# EAGLE board NicoLase Arduino Sheild (EAGLE 7.4.0)
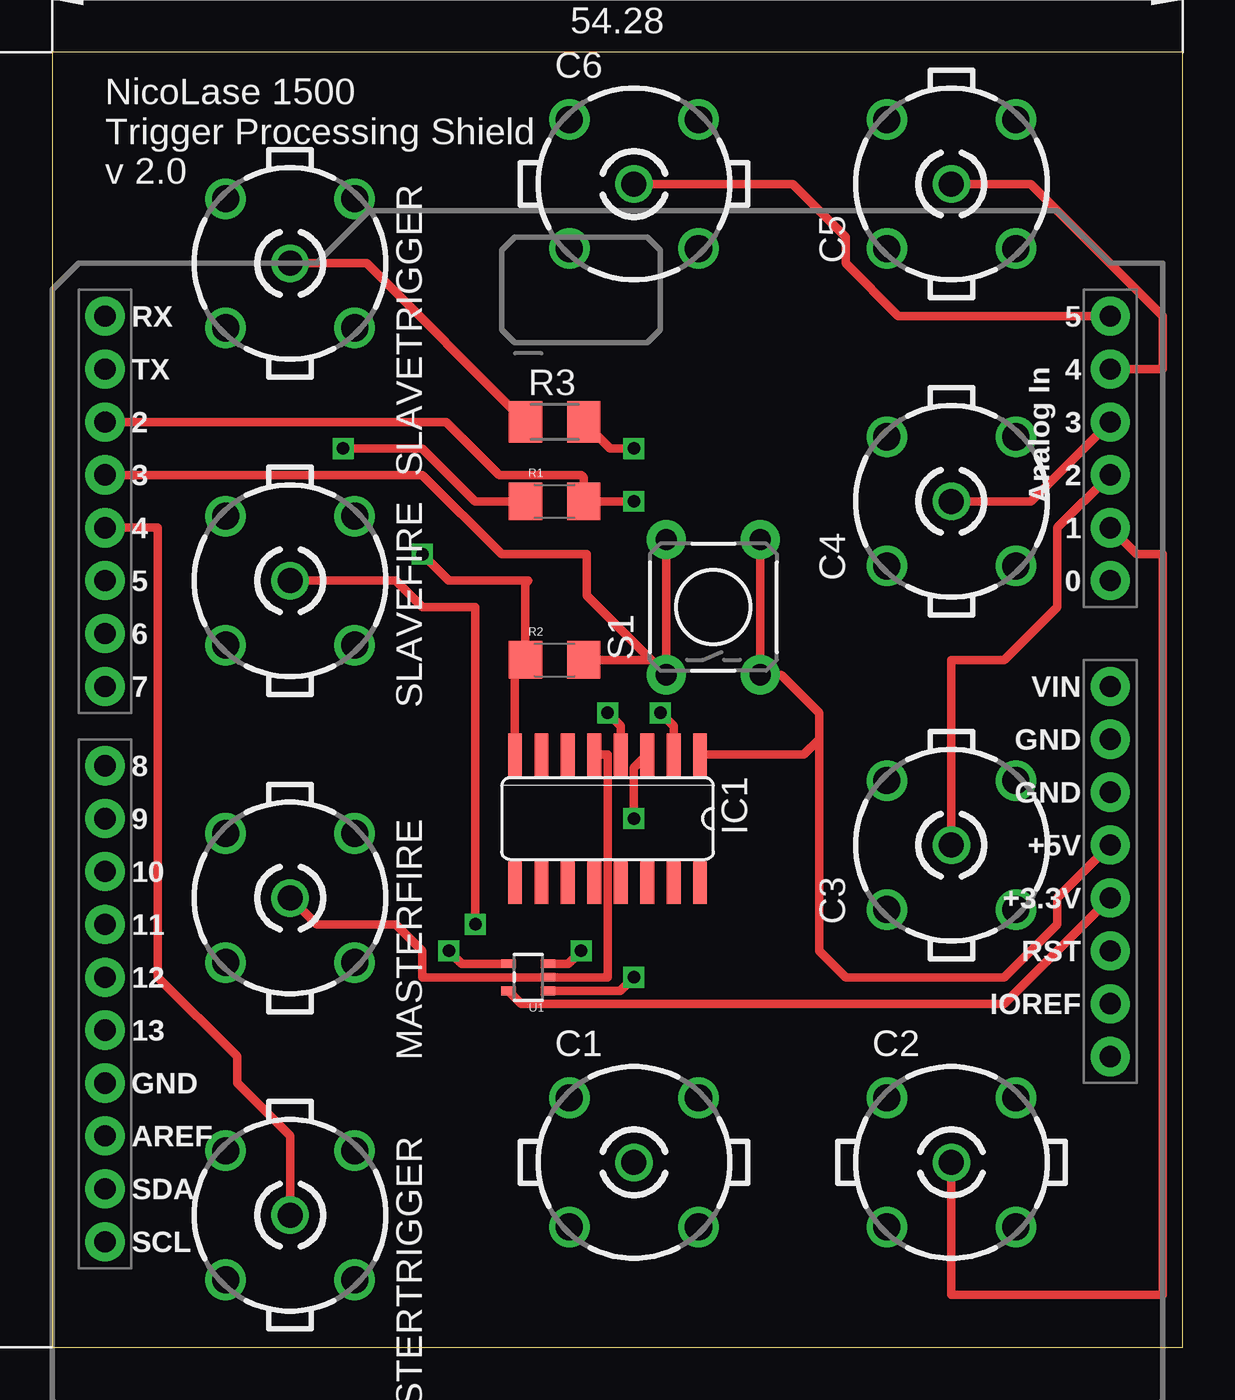
[diagram p0: board, top side]
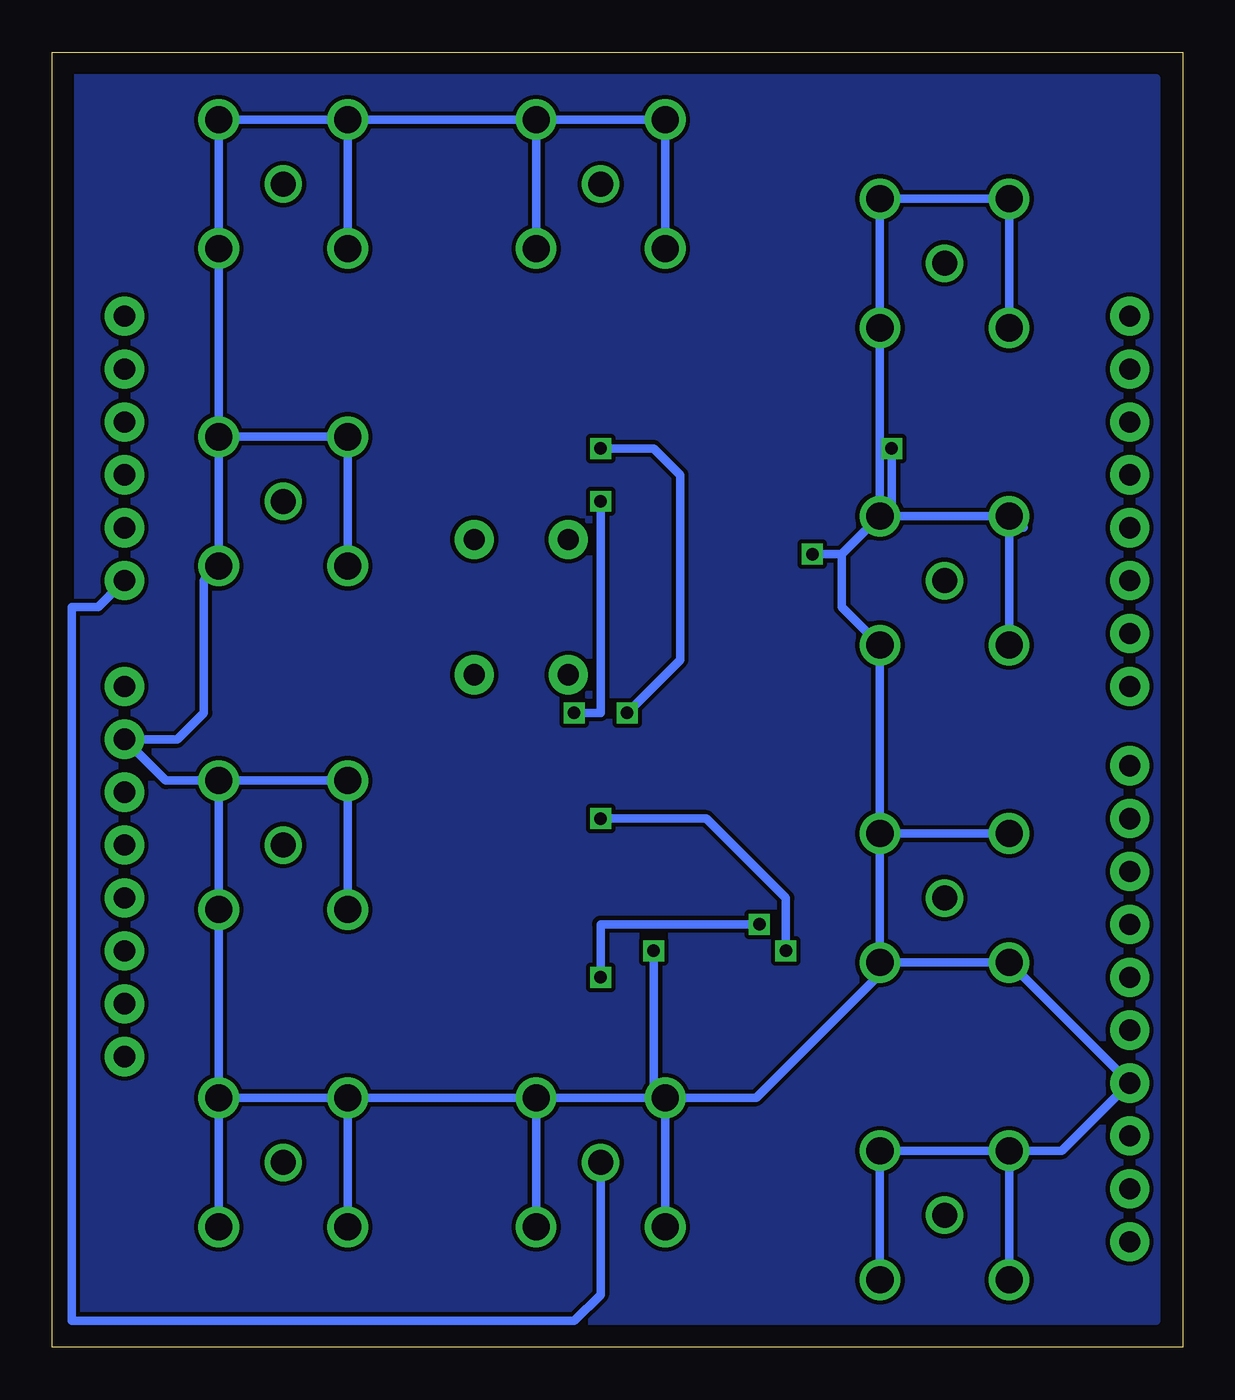
[diagram p1: board, bottom side, seen from below]

Size 54.28 x 62.22 mm. Coordinates in mm from the lower left corner, seen from the top.
Outline: 0,0 54.28,0 54.28,62.22 0,62.22 0,0
Copper layers (1*16): Top 0.035mm / dielectric 1.5mm / Bottom 0.035mm
Design rules "default": minimum track width 10mil, minimum drill 24mil, track to track 8mil, track to pad 8mil, pad to pad 8mil, via to via 8mil, smd to smd 8mil, copper to edge 40mil, drill to drill 8mil, minimum pad ring 10mil, minimum via ring 8mil, stop-mask expansion 4mil, vias tented up to drill 0mil, thermal gap 10mil

## Footprints (pad centres in the part's own frame; a part is rotated, then mirrored left to right if it is on the bottom)
B35N61 = drill 1.2: 1 0,0 | drill 1.3: 2 3.099,3.099; 3 -3.099,3.099; 4 -3.099,-3.099; 5 3.099,-3.099
SO16 = smd 0.66 x 2.032: 1 -4.445,-3.073; 2 -3.175,-3.073; 3 -1.905,-3.073; 4 -0.635,-3.073; 5 0.635,-3.073; 6 1.905,-3.073; 7 3.175,-3.073; 8 4.445,-3.073; 9 4.445,3.073; 10 3.175,3.073; 11 1.905,3.073; 12 0.635,3.073; 13 -0.635,3.073; 14 -1.905,3.073; 15 -3.175,3.073; 16 -4.445,3.073
UNO_R3_SHIELD = drill 1.016 pad 1.88: 3.3V 50.8,26.67; 5V 50.8,29.21; A0 50.8,41.91; A1 50.8,44.45; A2 50.8,46.99; A3 50.8,49.53; A4 50.8,52.07; A5 50.8,54.61; AREF 2.54,15.24; D2 2.54,49.53; D3 2.54,46.99; D4 2.54,44.45; D5 2.54,41.91; D6 2.54,39.37; D7 2.54,36.83; D8 2.54,33.02; D9 2.54,30.48; D10 2.54,27.94; D11 2.54,25.4; D12 2.54,22.86; D13 2.54,20.32; GND@0 50.8,31.75; GND@1 50.8,34.29; GND@2 2.54,17.78; IOREF 50.8,21.59; NC 50.8,19.05; RES 50.8,24.13; RX 2.54,54.61; SCL 2.54,10.16; SDA 2.54,12.7; TX 2.54,52.07; VIN 50.8,36.83
1206 = smd 1.6 x 1.8: 1 -1.4,0; 2 1.4,0
M1206 = smd 1.6 x 2: 1 -1.4,0; 2 1.4,0
TACTILE-PTH = drill 1.016 pad 1.88: 1 -3.251,2.261; 2 3.251,2.261; 3 -3.251,-2.261; 4 3.251,-2.261
SOT353 = smd 0.42 x 0.7: 1 -0.65,-0.95; 2 0,-0.95; 3 0.65,-0.95; 4 0.65,0.95; 5 -0.65,0.95

## Placement (x,y rotation side)
C1  BN35N61  [B35N61]  27.94,8.89 0 top
C2  BN35N61  [B35N61]  43.18,8.89 0 top
C3  BN35N61  [B35N61]  43.18,24.13 90 top
C4  BN35N61  [B35N61]  43.18,40.64 90 top
C5  BN35N61  [B35N61]  43.18,55.88 90 top
C6  BN35N61  [B35N61]  27.94,55.88 0 top
IC1  4050D  [SO16]  26.67,25.4 180 top
J1  ARDUINO_R3_SHIELD  [UNO_R3_SHIELD]  0,-5.08 0 top
MASTERFIRE  BN35N61  [B35N61]  11.43,21.59 270 top
MASTERTRIGGER  BN35N61  [B35N61]  11.43,6.35 270 top
R1  10k  [1206]  24.13,40.64 0 top
R2  10k  [1206]  24.13,33.02 0 top
R3  220  [M1206]  24.13,44.45 0 top
S1  [TACTILE-PTH]  31.75,35.56 90 top
SLAVEFIRE  BN35N61  [B35N61]  11.43,36.83 270 top
SLAVETRIGGER  BN35N61  [B35N61]  11.43,52.07 270 top
U1  7432SE  [SOT353]  22.86,17.78 90 top

## Library data of the parts
C1-C6 MASTERFIRE MASTERTRIGGER SLAVEFIRE SLAVETRIGGER = con-coax; OC_FARNELL: unknown; OC_NEWARK: unknown
IC1 = 40xx
J1 = SparkFun-Boards
R1 = SparkFun-Resistors
R2 = SparkFun-Passives
R3 = resistor
S1 = SparkFun-Retired
U1 = SparkFun-DigitalIC; PROD_ID: IC-10842

## Nets
N$1: J1.3.3V U1.5
N$2: C1.2 C1.3 C1.4 C1.5 C2.2 C2.3 C2.4 C2.5 C3.2 C3.3 C3.4 C3.5 C4.2 C4.3 C4.4 C4.5 C5.2 C5.3 C5.4 C5.5 C6.2 C6.3 C6.4 C6.5 IC1.8 J1.GND@1 J1.GND@2 MASTERFIRE.2 MASTERFIRE.3 MASTERFIRE.4 MASTERFIRE.5 MASTERTRIGGER.2 MASTERTRIGGER.3 MASTERTRIGGER.4 MASTERTRIGGER.5 R1.1 R2.1 SLAVEFIRE.2 SLAVEFIRE.3 SLAVEFIRE.4 SLAVEFIRE.5 SLAVETRIGGER.2 SLAVETRIGGER.3 SLAVETRIGGER.4 SLAVETRIGGER.5 U1.3
N$3: C1.1 J1.A0
N$4: C2.1 J1.A1
N$5: C3.1 J1.A2
N$6: C4.1 J1.A3
N$7: C5.1 J1.A4
N$8: C6.1 J1.A5
N$10: IC1.3 U1.4
N$11: R3.1 SLAVETRIGGER.1
N$13: J1.D3 R2.2 S1.1 S1.2
N$14: SLAVEFIRE.1 U1.1
N$15: IC1.4 R3.2
N$16: IC1.1 J1.5V S1.3 S1.4
N$17: IC1.2 J1.D2 R1.2
N$19: J1.D4 MASTERTRIGGER.1
SLAVEFIRE: IC1.5 MASTERFIRE.1 U1.2

## Tracks (layer width: path | path; a pad name or v marks a point on that pad's centre or on a via)
N$1
  Top 0.406: J1.3.3V 45.72,16.51 22.53,16.51 U1.5
N$2  (via drill 0.6)
  Top 0.406: R1.1 20.32,40.64 17.78,43.18 v13.97,43.18 | IC1.8 22.23,32.52 R2.1 22.73,36.7 22.86,36.83 19.05,36.83 v17.78,38.1 | U1.3 24.78,18.43 v25.4,19.05
  Bottom 0.406: MASTERTRIGGER.5 MASTERTRIGGER.4 | MASTERTRIGGER.4 MASTERTRIGGER.3 MASTERTRIGGER.2 | MASTERTRIGGER.4 5.79,9.45 J1.GND@2 MASTERFIRE.5 13.97,18.49 | 13.97,18.49 MASTERFIRE.2 MASTERFIRE.3 | MASTERFIRE.3 MASTERFIRE.4 | 24.84,11.43 C1.3 20.47,11.99 13.97,18.49 | 24.84,11.43 C1.4 | 30.48,11.99 C1.2 C2.3 40.64,11.99 | 30.48,11.99 25.4,11.99 | 25.4,11.99 24.84,11.43 | C1.5 31.04,11.43 30.48,11.99 | C2.5 C2.2 | 40.64,11.99 C2.2 | C2.4 40.08,11.43 40.64,11.99 | C2.2 C3.4 C3.5 | C3.3 C3.2 C3.5 | C3.5 48.82,27.23 J1.GND@1 48.26,29.21 46.99,30.48 46.99,36.83 C4.4 C4.5 | C4.5 C4.2 C4.3 | C4.5 C5.4 C5.5 C5.2 | C5.2 C5.3 | C5.2 C6.2 | C6.2 C6.5 | C6.2 C6.3 C6.4 | SLAVETRIGGER.5 SLAVETRIGGER.4 SLAVETRIGGER.3 SLAVETRIGGER.2 14.53,40.49 13.97,39.93 | 13.97,39.93 SLAVEFIRE.3 16.36,38.1 | 13.97,39.93 SLAVEFIRE.4 | SLAVEFIRE.4 8.18,39.93 7.62,39.37 7.77,39.37 SLAVEFIRE.4 | SLAVEFIRE.5 SLAVEFIRE.4 | v13.97,43.18 13.97,39.93 | MASTERFIRE.3 SLAVEFIRE.2 16.36,35.56 16.36,38.1 | v17.78,38.1 16.36,38.1 | v25.4,19.05 25.4,11.99
N$3
  Bottom 0.406: C1.1 27.94,2.54 29.21,1.27 53.34,1.27 53.34,35.56 52.07,35.56 J1.A0
N$4
  Top 0.406: C2.1 43.18,2.54 53.34,2.54 53.34,38.1 52.07,38.1 J1.A1
N$5
  Top 0.406: C3.1 43.18,33.02 45.72,33.02 48.26,35.56 48.26,39.37 J1.A2
N$6
  Top 0.406: C4.1 46.99,40.64 J1.A3
N$7
  Top 0.406: C5.1 46.99,55.88 53.34,49.53 53.34,46.99 J1.A4
N$8
  Top 0.406: C6.1 35.56,55.88 38.1,53.34 38.1,52.07 40.64,49.53 J1.A5
N$10  (via drill 0.6)
  Top 0.406: U1.4 19.67,18.43 v19.05,19.05 | v27.94,25.4 27.94,27.84 IC1.3
  Bottom 0.406: v19.05,19.05 19.05,21.59 22.86,25.4 v27.94,25.4
N$11
  Top 0.406: SLAVETRIGGER.1 15.11,52.07 R3.1
N$13
  Top 0.406: J1.D3 17.78,41.91 21.59,38.1 25.68,38.1 25.68,36.12 S1.1 | R2.2 28.78,33.02 S1.1 | S1.2 S1.1
N$14  (via drill 0.6)
  Top 0.406: SLAVEFIRE.1 16.51,36.83 17.78,35.56 20.32,35.56 v20.32,20.32 | U1.1 27.29,17.13 v27.94,17.78
  Bottom 0.406: v20.32,20.32 27.94,20.32 v27.94,17.78
N$15  (via drill 0.6)
  Top 0.406: IC1.4 27.3,29.85 v26.67,30.48 | R3.2 26.8,43.18 v27.94,43.18
  Bottom 0.406: v26.67,30.48 24.13,33.02 24.13,41.91 25.4,43.18 v27.94,43.18
N$16
  Top 0.406: 36.83,29.21 36.83,19.05 38.1,17.78 45.72,17.78 48.26,20.32 48.26,21.59 J1.5V | 36.83,29.21 36.83,30.48 35,32.31 S1.3 | S1.4 S1.3 | S1.3 34.01,32.03 34.29,31.75 34.29,32.03 S1.3 | IC1.1 36.09,28.47 36.83,29.21
N$17  (via drill 0.6)
  Top 0.406: J1.D2 18.92,44.45 21.46,41.91 25.4,41.91 25.53,41.78 R1.2 v27.94,40.64 | v29.21,30.48 29.85,29.85 IC1.2
  Bottom 0.406: v27.94,40.64 27.94,30.48 v29.21,30.48
N$19
  Top 0.406: MASTERTRIGGER.1 11.43,10.16 8.89,12.7 8.89,13.97 5.08,17.78 5.08,39.37 J1.D4
N$20
  pour Bottom: 1.27,1.27 26.67,1.27 53.34,1.27 53.34,60.96 1.27,60.96
SLAVEFIRE
  Top 0.406: MASTERFIRE.1 12.7,20.32 16.51,20.32 17.78,19.05 17.78,17.78 U1.2 26.67,17.78 26.67,28.47 IC1.5

## Text on the board
tPlace: NicoLase 1500 / Trigger Processing Shield / v 2.0